# Altium PCB lab2_lyaptsev_buck.PcbDoc
Units mm, origin at the board's own origin, x right, y up, seen from the top; angles counter-clockwise.
Board outline 51.7 x 19.8 mm, 2 copper layers (Top Layer, Bottom Layer), stack 1.57 mm thick; 26 components, 17 nets, 82 pads, 49 vias.
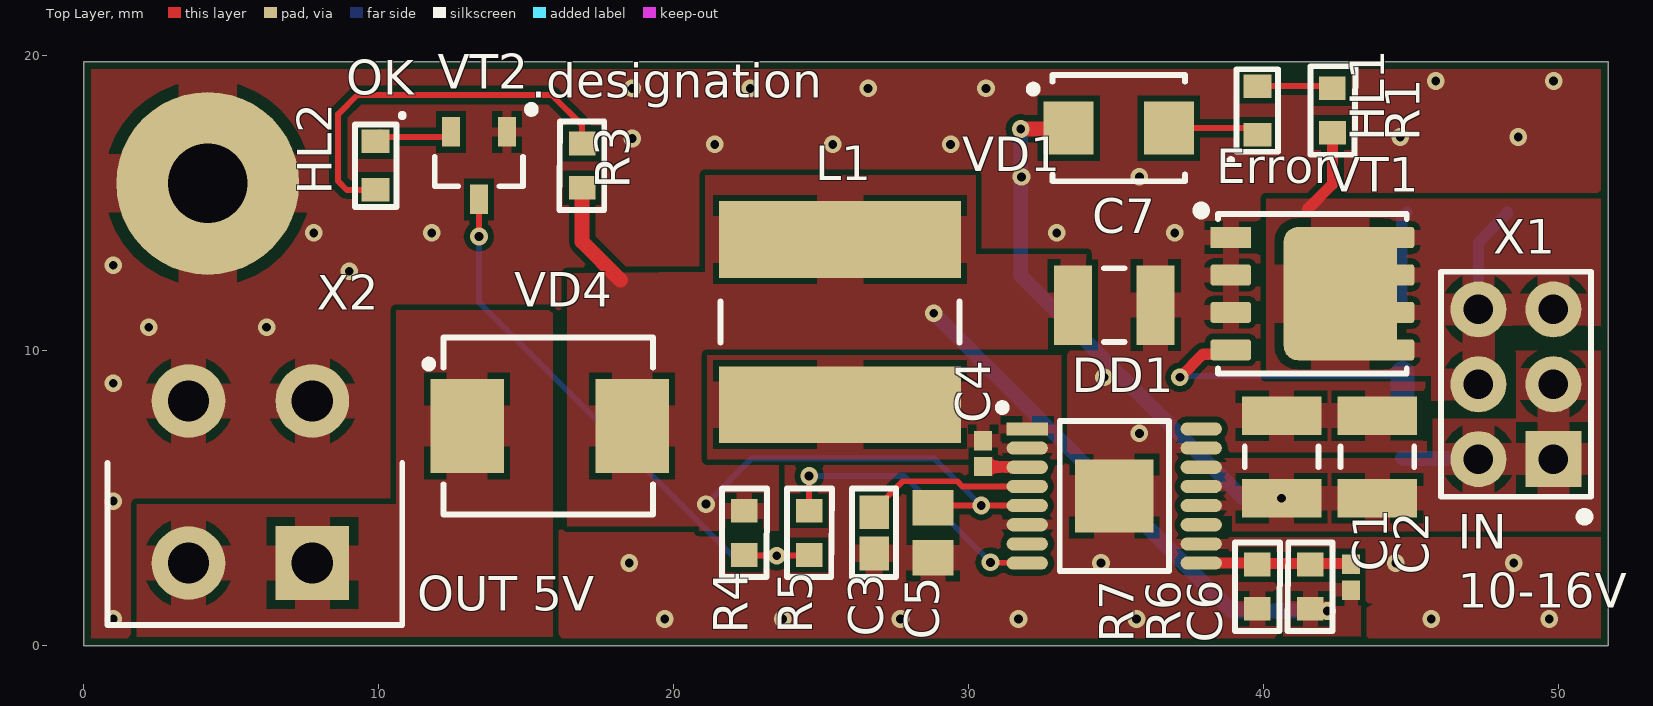
[diagram p0: Top Layer view]
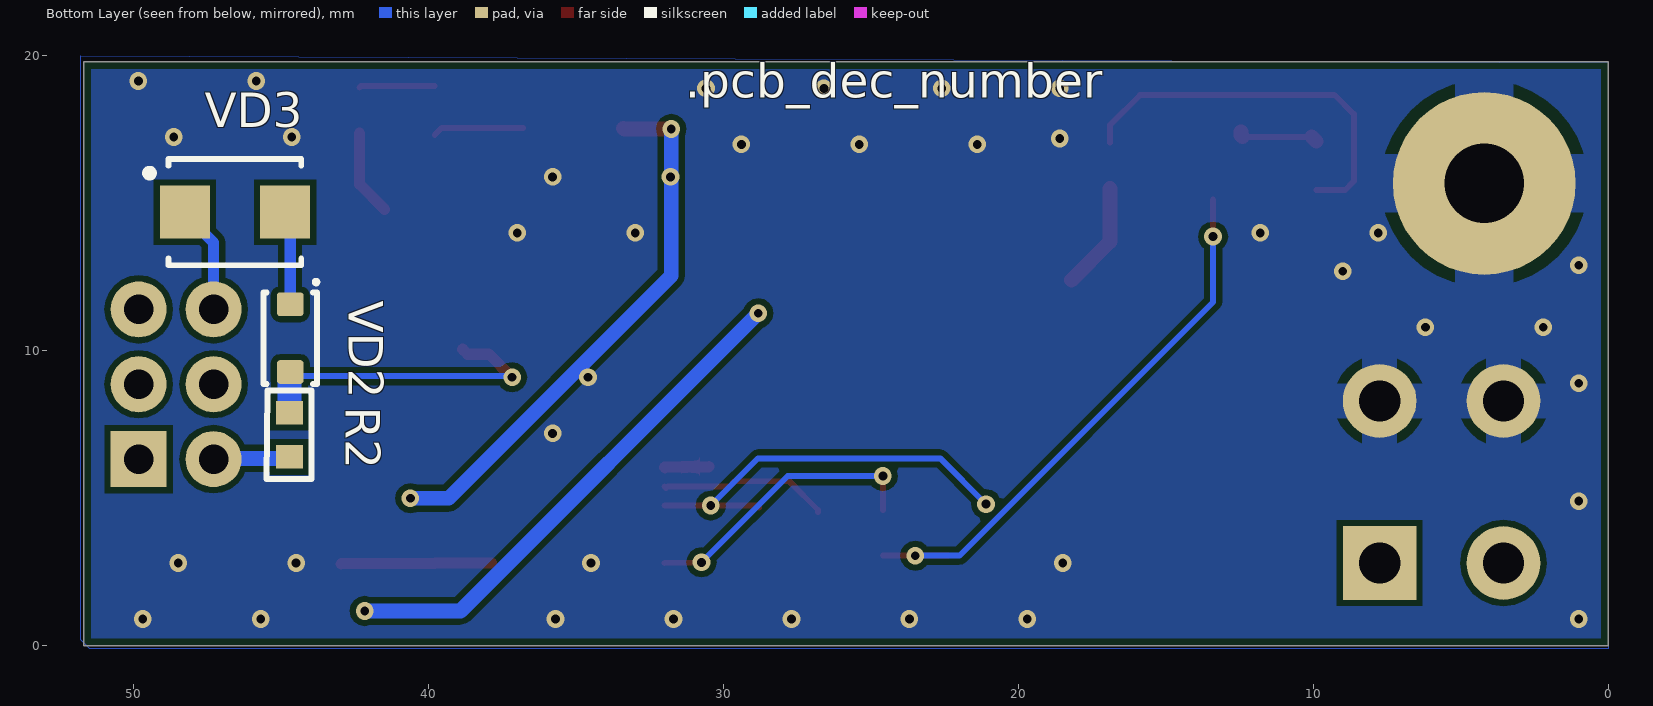
[diagram p1: Bottom Layer view, seen from below]

## Layer stack, top to bottom
Top Solder: solder mask 0.0102, Solder Resist, Dk 3.5
Top Layer: signal copper 0.035
Core 1: core 1.5, FR4, Dk 4.6
Bottom Layer: signal copper 0.035
Bottom Solder: solder mask 0.0102, Solder Resist, Dk 3.5

## Board outline
0,0 51.7,0 51.7,19.8 0,19.8

## Design rules (kind name [scope] priority, off if disabled: settings)
AcuteAngle min_acute_angle [OnCopper] p1: minimum=3.50000000000000E+0001 checktracksonly=FALSE // Минимальный угол между примитивами топологии
BoardOutlineClearance board_outline_clearance_std [NOT (OnLayer('Bottom Overlay') OR OnLayer('Top Overlay'))] p1: gap=0.25 ignorepadtopadclearanceinfootprint=FALSE except(0: Arc-SplitContinuation Track-SplitContinuation SMDPad-SplitContinuation THPad-SplitContinuation Via-SplitContinuation Fill-SplitContinuation Poly-SplitContinuation Region-SplitContinuation Text-SplitContinuation) // Отступ элементов топологии от края фрезеруемой печатной платы
Clearance clearance_outer_35um_std [OnTopLayer OR OnBottomLayer] p1: gap=0.2 ignorepadtopadclearanceinfootprint=TRUE except(0.25: Arc-Hole Track-Hole SMDPad-Hole THPad-Hole Via-Hole Fill-Hole Poly-Hole Region-Hole Text-Hole) // Зазоры на внешних слоях
Clearance clearance_inner_35um_std [NOT (OnTopLayer Or OnBottomLayer)] p2: gap=0.2 ignorepadtopadclearanceinfootprint=FALSE except(0.25: Arc-Hole Track-Hole SMDPad-Hole THPad-Hole Via-Hole Fill-Hole Poly-Hole Region-Hole Text-Hole) // Зазоры на внутренних слоях
ComponentClearance [All] p1: gap=0 collisioncheckmode=3 verticalgap=0 showdistances=FALSE
DiffPairsRouting diff_pairs_routing [All] p1: maxlimit=0.127 minlimit=0.127 mostfreqgap=0.127 toplayer_minwidth=0.143 toplayer_maxwidth=0.143 toplayer_prefwidth=0.143 bottomlayer_minwidth=0.143 bottomlayer_maxwidth=0.143 bottomlayer_prefwidth=0.143 impedanceprofiledriven=TRUE impedanceprofileid={FD46899E-B5A2-4EF5-A302-5D2DB6A51F35} maxuncoupledlength=12.7 // Правила трассировки дифференциальных пар
HoleSize min_hole_size_std [IsPad] p1: absolutevalues=TRUE maxlimit=5.9 minlimit=0.6 maxpercent=80.000 minpercent=20.000 // Диаметр межслойного переходного отверстия
HoleSize min_hole_size_via_std [IsVia] p2: absolutevalues=TRUE maxlimit=5.9 minlimit=0.3 maxpercent=80.000 minpercent=20.000 // Минимальный диаметр монтажного отверстия
HoleToHoleClearance hole_to_hole_clearance_std [All] p1: gap=0.2 allowstackedmicrovias=FALSE // Минимальное расстояние между краями двух отверстий
MinimumAnnularRing min_via_ar_std [All] p1: minimumring=0.15 // Поясок площадки переходного отверстия (Annular ring VIA)
MinimumAnnularRing min_pad_ar_std [All] p2: minimumring=0.2 // Поясок монтажной контактной площадки (Annular ring PAD)
MinimumSolderMaskSliver min_solder_mask_bridge_std [All] p1: minsoldermaskwidth=0.15 // Мнимальная ширина масочного мостика
PlaneClearance plane_clearance_35um_std [All] p1: clearance=0.2 // Отступ полигона (для слоя plane) от элементов топологии
PlaneConnect [All] p1: planeconnectstyle=Relief reliefexpansion=0.5 reliefentries=4 reliefconductorwidth=0.2 reliefairgap=0.2
PolygonConnect poly_connect_to_pad<=0.3 [(AsMM(PadXSize_AllLayers)<=0.301) or (AsMM(PadYSize_AllLayers)<=0.301)] p1: thpad.connectstyle=Relief thpad.reliefconductorwidth=0.2 thpad.reliefentries=4 thpad.polygonreliefangle="90 Angle" thpad.airgapwidth=0.2 smdpad.connectstyle=Relief smdpad.reliefconductorwidth=0.2 smdpad.reliefentries=4 smdpad.polygonreliefangle="90 Angle" smdpad.airgapwidth=0.2 via.connectstyle=Direct via.reliefconductorwidth=0.254 via.reliefentries=4 via.polygonreliefangle="90 Angle" via.airgapwidth=0.254 // Правила подключения полигонов для падов от 0,3мм и меньше
PolygonConnect poly_connect_to_pad<=0.4 [(AsMM(PadXSize_AllLayers)<=0.401) or (AsMM(PadYSize_AllLayers)<=0.401)] p2: thpad.connectstyle=Relief thpad.reliefconductorwidth=0.26 thpad.reliefentries=4 thpad.polygonreliefangle="90 Angle" thpad.airgapwidth=0.2 smdpad.connectstyle=Relief smdpad.reliefconductorwidth=0.26 smdpad.reliefentries=4 smdpad.polygonreliefangle="90 Angle" smdpad.airgapwidth=0.2 via.connectstyle=Direct via.reliefconductorwidth=0.254 via.reliefentries=4 via.polygonreliefangle="90 Angle" via.airgapwidth=0.254 // Правила подключения полигонов для падов от 0,4 и меньше
PolygonConnect poly_connect_to_pad<=0.6 [(AsMM(PadXSize_AllLayers)<=0.601) or (AsMM(PadYSize_AllLayers)<=0.601)] p3: thpad.connectstyle=Relief thpad.reliefconductorwidth=0.33 thpad.reliefentries=4 thpad.polygonreliefangle="90 Angle" thpad.airgapwidth=0.2 smdpad.connectstyle=Relief smdpad.reliefconductorwidth=0.33 smdpad.reliefentries=4 smdpad.polygonreliefangle="90 Angle" smdpad.airgapwidth=0.2 via.connectstyle=Direct via.reliefconductorwidth=0.254 via.reliefentries=4 via.polygonreliefangle="90 Angle" via.airgapwidth=0.254 // Правила подключения полигонов для падов от 0,6мм и меньше
PolygonConnect poly_connect_to_pad<=0.7 [(AsMM(PadXSize_AllLayers)<=0.701) or (AsMM(PadYSize_AllLayers)<=0.701)] p4: thpad.connectstyle=Relief thpad.reliefconductorwidth=0.46 thpad.reliefentries=4 thpad.polygonreliefangle="90 Angle" thpad.airgapwidth=0.2 smdpad.connectstyle=Relief smdpad.reliefconductorwidth=0.46 smdpad.reliefentries=4 smdpad.polygonreliefangle="90 Angle" smdpad.airgapwidth=0.2 via.connectstyle=Direct via.reliefconductorwidth=0.254 via.reliefentries=4 via.polygonreliefangle="90 Angle" via.airgapwidth=0.254 // Правила подключения полигонов для падов от 0,7мм и меньше
PolygonConnect poly_connect_to_pad<=0.8 [(AsMM(PadXSize_AllLayers)<=0.8)or(AsMM(PadYSize_AllLayers)<=0.8)] p5: thpad.connectstyle=Relief thpad.reliefconductorwidth=0.53 thpad.reliefentries=4 thpad.polygonreliefangle="90 Angle" thpad.airgapwidth=0.3 smdpad.connectstyle=Relief smdpad.reliefconductorwidth=0.53 smdpad.reliefentries=4 smdpad.polygonreliefangle="90 Angle" smdpad.airgapwidth=0.2 via.connectstyle=Direct via.reliefconductorwidth=0.254 via.reliefentries=4 via.polygonreliefangle="90 Angle" via.airgapwidth=0.254 // Правила подключения полигонов для падов от 0,8мм и меньше
PolygonConnect poly_connect_to_pad<=1 [(AsMM(PadXSize_AllLayers)<=1.01)or(AsMM(PadYSize_AllLayers)<=1.01)] p6: thpad.connectstyle=Relief thpad.reliefconductorwidth=0.6 thpad.reliefentries=4 thpad.polygonreliefangle="90 Angle" thpad.airgapwidth=0.3 smdpad.connectstyle=Relief smdpad.reliefconductorwidth=0.6 smdpad.reliefentries=4 smdpad.polygonreliefangle="90 Angle" smdpad.airgapwidth=0.2 via.connectstyle=Direct via.reliefconductorwidth=0.254 via.reliefentries=4 via.polygonreliefangle="90 Angle" via.airgapwidth=0.254 // Правила подключения полигонов для падов от 1мм и меньше
PolygonConnect poly_connect_to_pad<=1.3 [(AsMM(PadXSize_AllLayers)<=1.31)or(AsMM(PadYSize_AllLayers)<=1.31)] p7: thpad.connectstyle=Relief thpad.reliefconductorwidth=0.66 thpad.reliefentries=4 thpad.polygonreliefangle="90 Angle" thpad.airgapwidth=0.3 smdpad.connectstyle=Relief smdpad.reliefconductorwidth=0.86 smdpad.reliefentries=4 smdpad.polygonreliefangle="90 Angle" smdpad.airgapwidth=0.2 via.connectstyle=Direct via.reliefconductorwidth=0.254 via.reliefentries=4 via.polygonreliefangle="90 Angle" via.airgapwidth=0.254 // Правила подключения полигонов для падов от 1,3мм и меньше
PolygonConnect poly_connect_to_pad<=1.6 [(AsMM(PadXSize_AllLayers)<=1.61)or(AsMM(PadYSize_AllLayers)<=1.61)] p8: thpad.connectstyle=Relief thpad.reliefconductorwidth=0.8 thpad.reliefentries=4 thpad.polygonreliefangle="90 Angle" thpad.airgapwidth=0.3 smdpad.connectstyle=Relief smdpad.reliefconductorwidth=1 smdpad.reliefentries=4 smdpad.polygonreliefangle="90 Angle" smdpad.airgapwidth=0.2 via.connectstyle=Direct via.reliefconductorwidth=0.254 via.reliefentries=4 via.polygonreliefangle="90 Angle" via.airgapwidth=0.254 // Правила подключения полигонов для падов от 1,6мм и меньше
PolygonConnect poly_connect_to_pad<=1.8 [(AsMM(PadXSize_AllLayers)<=1.8)or(AsMM(PadYSize_AllLayers)<=1.8)] p9: thpad.connectstyle=Relief thpad.reliefconductorwidth=1 thpad.reliefentries=4 thpad.polygonreliefangle="90 Angle" thpad.airgapwidth=0.3 smdpad.connectstyle=Relief smdpad.reliefconductorwidth=1.2 smdpad.reliefentries=4 smdpad.polygonreliefangle="90 Angle" smdpad.airgapwidth=0.2 via.connectstyle=Direct via.reliefconductorwidth=0.254 via.reliefentries=4 via.polygonreliefangle="90 Angle" via.airgapwidth=0.254 // Правила подключения полигонов для падов от 1,8мм и меньше
PolygonConnect poly_connect_to_pad<=2 [(AsMM(PadXSize_AllLayers)<=2.01)or(AsMM(PadYSize_AllLayers)<=2.01)] p10: thpad.connectstyle=Relief thpad.reliefconductorwidth=1.1 thpad.reliefentries=4 thpad.polygonreliefangle="90 Angle" thpad.airgapwidth=0.3 smdpad.connectstyle=Relief smdpad.reliefconductorwidth=1.4 smdpad.reliefentries=4 smdpad.polygonreliefangle="90 Angle" smdpad.airgapwidth=0.2 via.connectstyle=Direct via.reliefconductorwidth=0.254 via.reliefentries=4 via.polygonreliefangle="90 Angle" via.airgapwidth=0.254 // Правила подключения полигонов для падов от 2мм и меньше
PolygonConnect poly_connect_to_pad<=2.3 [(AsMM(PadXSize_AllLayers)<=2.31)or(AsMM(PadYSize_AllLayers)<=2.31)] p11: thpad.connectstyle=Relief thpad.reliefconductorwidth=1.2 thpad.reliefentries=4 thpad.polygonreliefangle="90 Angle" thpad.airgapwidth=0.3 smdpad.connectstyle=Relief smdpad.reliefconductorwidth=1.4 smdpad.reliefentries=4 smdpad.polygonreliefangle="90 Angle" smdpad.airgapwidth=0.2 via.connectstyle=Direct via.reliefconductorwidth=0.254 via.reliefentries=4 via.polygonreliefangle="90 Angle" via.airgapwidth=0.254 // Правила подключения полигонов для падов от 2,3мм и меньше
PolygonConnect poly_connect_to_pad<=2.5 [(AsMM(PadXSize_AllLayers)<=2.51)or(AsMM(PadYSize_AllLayers)<=2.51)] p12: thpad.connectstyle=Relief thpad.reliefconductorwidth=1.2 thpad.reliefentries=4 thpad.polygonreliefangle="90 Angle" thpad.airgapwidth=0.3 smdpad.connectstyle=Relief smdpad.reliefconductorwidth=1.4 smdpad.reliefentries=4 smdpad.polygonreliefangle="90 Angle" smdpad.airgapwidth=0.2 via.connectstyle=Direct via.reliefconductorwidth=0.254 via.reliefentries=4 via.polygonreliefangle="90 Angle" via.airgapwidth=0.254 // Правила подключения полигонов для падов от 2,5мм и меньше
PolygonConnect poly_connect_to_pad<=2.7 [(AsMM(PadXSize_AllLayers)<=2.71)or(AsMM(PadYSize_AllLayers)<=2.71)] p13: thpad.connectstyle=Relief thpad.reliefconductorwidth=1.4 thpad.reliefentries=4 thpad.polygonreliefangle="90 Angle" thpad.airgapwidth=0.3 smdpad.connectstyle=Relief smdpad.reliefconductorwidth=1.6 smdpad.reliefentries=4 smdpad.polygonreliefangle="90 Angle" smdpad.airgapwidth=0.2 via.connectstyle=Direct via.reliefconductorwidth=0.254 via.reliefentries=4 via.polygonreliefangle="90 Angle" via.airgapwidth=0.254 // Правила подключения полигонов для падов от 2,7мм и меньше
PolygonConnect poly_connect_to_pad<=3 [(AsMM(PadXSize_AllLayers)<=3.01)or(AsMM(PadYSize_AllLayers)<=3.01)] p14: thpad.connectstyle=Relief thpad.reliefconductorwidth=1.6 thpad.reliefentries=4 thpad.polygonreliefangle="90 Angle" thpad.airgapwidth=0.3 smdpad.connectstyle=Relief smdpad.reliefconductorwidth=1.8 smdpad.reliefentries=4 smdpad.polygonreliefangle="90 Angle" smdpad.airgapwidth=0.2 via.connectstyle=Direct via.reliefconductorwidth=0.254 via.reliefentries=4 via.polygonreliefangle="90 Angle" via.airgapwidth=0.254 // Правила подключения полигонов для падов от 3мм и меньше
PolygonConnect poly_connect_to_pad<=7 [(AsMM(PadXSize_AllLayers)<7.01)or(AsMM(PadYSize_AllLayers)<=7.01)] p15: thpad.connectstyle=Relief thpad.reliefconductorwidth=2 thpad.reliefentries=4 thpad.polygonreliefangle="90 Angle" thpad.airgapwidth=0.4 smdpad.connectstyle=Relief smdpad.reliefconductorwidth=2 smdpad.reliefentries=4 smdpad.polygonreliefangle="90 Angle" smdpad.airgapwidth=0.3 via.connectstyle=Direct via.reliefconductorwidth=0.254 via.reliefentries=4 via.polygonreliefangle="90 Angle" via.airgapwidth=0.254 // Правила подключения полигонов для падов от 7мм и меньше
PolygonConnect poly_connect_to_pad [All] p16: thpad.connectstyle=Relief thpad.reliefconductorwidth=0.25 thpad.reliefentries=4 thpad.polygonreliefangle="90 Angle" thpad.airgapwidth=0.2 smdpad.connectstyle=Relief smdpad.reliefconductorwidth=0.25 smdpad.reliefentries=4 smdpad.polygonreliefangle="90 Angle" smdpad.airgapwidth=0.2 via.connectstyle=Direct via.reliefconductorwidth=0.25 via.reliefentries=4 via.polygonreliefangle="90 Angle" via.airgapwidth=0.2 // Правила подключения полигонов общие
RoutingCorners [All] p1 off: cornerstyle=45-Degree minsetback=2.5 maxsetback=2.5
RoutingVias [All] p1: holewidth=0.3 width=0.6 viastyle="Through Hole" minholewidth=0.3 minwidth=0.6 maxholewidth=5.9 maxwidth=6.4
SilkToSilkClearance silk_to_silk_clearance_std [All] p1 off: silktosilkclearance=0.15 // Отступ текста шелкографии от других примитивов шелкографии
SilkToSolderMaskClearance silk_to_solder_mask_clearance_std [IsPad] p1 off: minsilkscreentomaskgap=0.15 clearancetoexposedcopper=FALSE // Минимальное расстояние между элементами шелкографии и вскрытой медью
SolderMaskExpansion solder_mask_expansion_std [All] p1: expansion=0.05 // Припуск паяльной масски
UnRoutedNet [All] p1: checkbadconnections=TRUE
Width width_35um_std [All] p1: maxlimit=10 minlimit=0.2 preferedwidth=0.2 checkconnectedcopper=TRUE // Ширина проводников (общая)
19 further rules are at their usual default settings.

## Components (designator, comment, footprint, x,y, rotation, side; value= is the part's Value field where it differs from the comment)
C1 "10мк" C1210 40.625,6.4 r90 top
C2 "22мк" C1210 43.875,6.4 r90 top
C3 "10 мк" C0603 26.8,3.825 r270 top
C4 "470н" C0402 30.5,6.515 r90 top
C5 "4,7 мк" C0805 28.8,3.825 r270 top
C6 "20п" C0402 42.975,2.325 r90 top
C7 "22мк" C1210 34.95,11.55 r0 top
DD1 "LM46002PWP" HTSSOP-16 34.95,5.075 r0 top
HL1 "TLMS1000-GS08" HL0603 39.8,18.15 r90 top
HL2 "TLMG1100-GS08" HL0603 9.9,16.28 r270 top
L1 "SRN8040-100M" SRN-2-815X790X400 25.65,10.975 r90 top
R1 "2 к" R0603 42.35,18.15 r90 top
R2 "100" R0603 44.725,7.15 r270 bottom
R3 "2 к" R0603 16.9,16.28 r270 top
R4 "44,2 к" R0603 22.4,3.825 r90 top
R5 "100" R0603 24.6,3.825 r90 top
R6 "1 М" R0603 41.6,2 r270 top
R7 "255 к" R0603 39.8,2 r90 top
VD1 "SL13-E3/5AT" DO-214AC 35.1,17.55 r0 top
VD2 "PLZ15C" DO-219AC 44.725,10.43 r90 bottom
VD3 "SL13-E3/5AT" DO-214AC 46.575,14.7 r180 bottom
VD4 "SS36-E3/57T" DO-214AB 15.8,7.45 r0 top
VT1 "CSD19532Q5B" SON-8 41.67,11.935 r270 top
VT2 "IRLML2502TRPBF" SOT-23-3 13.4,16.28 r270 top
X1 "DS1021-2*3SF11" DS1021-2X3SF11 48.57,8.865 r90 top
X2 "4-1775099-0" 4-1775099-0 5.8,6.2 r180 top

## Footprints (in the part's own frame and the unit in brackets; to place one, negate y for a bottom-side part, rotate by r counter-clockwise, add the part's x,y. Pads: shape width x height; smd on the part's side, far side on the other; paste and mask are expansions set on the pad)
4-1775099-0 [mm]
  rect 2.5x2.5 hole 1.4: 1(-1.95,3.4)
  round 2.5 hole 1.4: 2(2.25,3.4) 3(-1.95,-2.1) 4(2.25,-2.1)
  silkscreen extent -5,0 5,5.5, body extent -4.95,-5.45 4.9,5.45, height 12.8
C0402 [mm] "Chip Capacitor, 2-Leads, Body 1,00x0,50mm, IPC Medium Density"
  rect 0.66x0.62 smd: 1(-0.44,0) 2(0.44,0)
  body extent -0.5,-0.25 0.5,0.25, height 0.5
C0603 [mm] "Chip Capacitor, 2-Leads, Body 1,60x0,80mm, IPC Medium Density"
  rect 1.15x1 smd: 1(-0.7,0) 2(0.7,0)
  silkscreen extent -1.5,-0.75 1.5,0.75, body extent -0.8,-0.4 0.8,0.4, height 0.8
C0805 [mm] "Chip Diode, 2-Leads, Body 2,00x1,25mm, IPC Medium Density"
  rect 1.2x1.4 smd: 1(-0.85,0) 2(0.85,0)
  body extent -1.05,-0.67 1.05,0.67, height 0.85
C1210 [mm] "Chip Diode, 2-Leads, Body 3,20x2,50mm, IPC Medium Density"
  rect 1.3x2.7 smd: 1(-1.4,0) 2(1.4,0)
  silkscreen extent -0.35,-1.25 0.35,1.25, body extent -1.7,-1.35 1.7,1.35, height 0.85
DO-214AB [mm] "Molded Diode, 2-Leads, Body 7,94x5,91mm, IPC Medium Density"
  rect 2.5x3.2 smd: 1(-2.8,0) 2(2.8,0)
  silkscreen extent -4.22,-3 3.5,3, body extent -3.95,-2.95 3.95,2.95, height 2.59
DO-214AC [mm] "Molded Diode, 2-Leads, Body 4,25x2,67mm, IPC Medium Density"
  rect 1.7x1.8 smd: 1(-1.7,0) 2(1.7,0)
  silkscreen extent -3.02,-1.8 2.25,1.8, body extent -2.7,-1.81 2.7,1.81, height 2.43
DO-219AC [mm]
  rrect25% 0.8x0.9 smd: 1(-1.15,-0.025) 2(1.15,-0.025)
  silkscreen extent -1.55,-0.97 1.97,0.88, body extent -1.22,-0.67 1.28,0.63, height 0.71
DS1021-2X3SF11 [mm]
  rect 1.9x1.9 hole 1: 1(-2.54,-1.27)
  round 1.9 hole 1: 2(-2.54,1.27) 3(0,-1.27)
  round 1.9 hole 1 mask+0.102: 4(0,1.27) 5(2.54,-1.27) 6(2.54,1.27)
  silkscreen extent -4.5,-2.55 3.81,2.54, body extent -3.81,-2.54 3.81,2.54, height 8.59
HL0603 [mm] "Chip Diode, 2-Leads, Body 1,60x0,80mm, IPC Medium Density"
  rect 0.8x0.95 smd: 1(-0.825,0) 2(0.825,0)
  silkscreen extent -1.75,-0.7 1.4,0.95, body extent -0.81,-0.4 0.81,0.4, height 0.6
HTSSOP-16 [mm] "TSOP, 16-Leads, Body 5,00x4,40mm, Pitch 0,65mm, Thermal Pad 2,46x2,66mm, IPC Medium Density"
  rect 2.66x2.46 smd: 0(0,0)
  rect 1.4x0.45 smd: 1(-2.95,2.275)
  oval 1.4x0.45 smd: 2(-2.95,1.625) 3(-2.95,0.975) 4(-2.95,0.325) 5(-2.95,-0.325) 6(-2.95,-0.975) 7(-2.95,-1.625) 8(-2.95,-2.275) 9(2.95,-2.275) 10(2.95,-1.625) 11(2.95,-0.975) 12(2.95,-0.325) 13(2.95,0.325) 14(2.95,0.975) 15(2.95,1.625) 16(2.95,2.275)
  silkscreen extent -3.92,-2.55 1.85,3.12, body extent -3.2,-2.5 3.2,2.5, height 1.2
R0603 [mm] "Chip Resistor, 2-Leads, Body 1,60x0,80mm, IPC Medium Density"
  rect 0.8x0.9 smd: 1(-0.75,0) 2(0.75,0)
  silkscreen extent -1.5,-0.77 1.5,0.75, body extent -0.77,-0.43 0.78,0.43, height 0.43
SON-8 [mm]
  rrect25% 0.71x1.372 smd paste-10: D(-1.905,2.77) D(-0.635,2.77) D(0.635,2.77) D(1.905,2.77)
  rrect25% 4.52x3.85 smd paste-10: D(0,0.95)
  rrect25% 0.71x1.372 smd paste-0.002: G(1.905,-2.77) S(-0.635,-2.77) S(0.635,-2.77)
  rect 0.71x1.372 smd paste-0.002: S(-1.905,-2.77)
  silkscreen extent -2.83,-3.78 2.7,3.2, body extent -2.48,-3.05 2.52,2.95, height 1.05
SOT-23-3 [mm] "SOT-23, 3-Leads, Body 2,92x2,37mm"
  rect 1x0.6 smd: D(-1.145,-0.95) G(1.145,0) S(-1.145,0.95)
  silkscreen extent -2.03,-1.5 0.7,1.9, body extent -1.25,-1.5 1.25,1.5, height 1.1
SRN-2-815X790X400 [mm]
  rect 2.6x8.2 smd: 1(-2.8,0) 2(2.8,0)
  silkscreen extent -0.7,-4.05 0.7,4.05, body extent -4.01,-4 4.01,4, height 4

## Part data
C1: library part с0036, "=Описание", HelpURL=https://search.murata.co.jp/Ceramy/image/img/A01X/G101/ENG/GRM32ER71H106KA12-04A.pdf, ID=с0036, Корпус=1210, Наименование=GRM32ER71H106KA12L, Напряжение="50 В", Номинал=10мк, Номинальное напряжение="50 В", Описание="Конденсатор чип 1210 10 мкФ 50 В ±15 %", Отклонение="±15 %", Производитель=MuRata, Рабочие температуры="от -55 °С до +125 °С", Фамилия=Ляпцев
C2: library part с0035, "=Описание", HelpURL=https://www.yageo.com/upload/media/product/productsearch/datasheet/mlcc/UPY-GPHC_X7R_6.3V-to-50V_20.pdf, ID=с0035, Корпус=1210, Наименование=CC1210KKX7R8BB226, Напряжение="25 В", Номинал=22мк, Номинальное напряжение="25 В", Описание="Конденсатор чип 1210 22 мкФ 25 В ±15 %", Отклонение="±15 %", Производитель="YAGEO Corp.", Рабочие температуры="от -55 °С до +125 °С", Фамилия=Ляпцев
C3: library part с0040, "=Описание", HelpURL=https://www.yageo.com/upload/media/product/productsearch/datasheet/mlcc/UPY-GPHC_X5R_4V-to-50V_26.pdf, ID=с0040, Корпус=0603, Наименование=CC0603MRX5R5BB106, Напряжение="6,3 В", Номинал="10 мк", Номинальное напряжение="6,3 В", Описание="Конденсатор чип 0603 10 мкФ 6,3 В ±20 %", Отклонение="±20 %", Производитель="YAGEO Corp.", Рабочие температуры="от -55 °С до +85 °С", Фамилия=Ляпцев
C4: library part с0039, "=Описание", HelpURL=https://www.murata.com/en-sg/products/productdetail?partno=GRM155R60J474KE19%23, ID=с0039, Корпус=0402, Наименование=GRM155R60J474KE19D, Напряжение="6,3 В", Номинал=470н, Номинальное напряжение="6,3 В", Описание="Конденсатор чип 0402 470 нФ 6,3 В ±15 %", Отклонение="±15 %", Производитель=MuRata, Рабочие температуры="от -55 °С до +85 °С", Фамилия=Ляпцев
C5: library part с0041, "=Описание", HelpURL=https://www.murata.com/en-global/products/productdetail?partno=GRM219R61A475KE34%23, ID=с0041, Корпус=805, Наименование=GRM219R61A475KE34, Напряжение="10 В", Номинал="4,7 мк", Номинальное напряжение="10 В", Описание="Конденсатор чип 0805 4,7 мкФ 10 В ±15 %", Отклонение="±15 %", Производитель=MuRata, Рабочие температуры="от -55 °С до +85 °С", Фамилия=Ляпцев
C6: library part с0038, "=Описание", HelpURL=https://www.yageo.com/upload/media/product/productsearch/datasheet/mlcc/UPY-GP_NP0_16V-to-50V_18.pdf, ID=с0038, Корпус=0402, Наименование=CC0402JRNPO9BN200, Напряжение="50 В", Номинал=20п, Номинальное напряжение="50 В", Описание="Конденсатор чип 0402 20 пФ 25 В ±5 %", Отклонение="±5 %", Производитель="YAGEO Corp.", Рабочие температуры="от -55 °С до +85 °С", Фамилия=Ляпцев
C7: library part с0037, "=Описание", HelpURL=https://search.murata.co.jp/Ceramy/image/img/A01X/G101/ENG/GRM32ER61E226KE15-01.pdf, ID=с0037, Корпус=1210, Наименование=GRM32ER61E226KE15L, Напряжение="25 В", Номинал=22мк, Номинальное напряжение="25 В", Описание="Конденсатор чип 1210 22 мкФ 25 В ±15 %", Отклонение="±15 %", Производитель=MuRata, Рабочие температуры="от -55 °С до +125 °С", Фамилия=Ляпцев
DD1: library part dd0006, "=Описание", HelpURL=https://www.ti.com/product/LM46002, ID=dd0006, Входное напряжение="от 3,5 В до 60 В", Выходное напряжение="от 1 В до 28 В", Коммутируемый ток="от 0 А до 2 А", Корпус=HTSSOP-16, Наименование=LM46002PWP, Описание="Понижающий преобразователь напряжения 60 В и 2 А", Производитель="Texas Instruments", Рабочие температуры="от -40 °С до +125 °С", Фамилия=Ляпцев, Частота переключения="от 200 кГц до 2,2 МГц"
HL1: library part hl0001, "=Описание", HelpURL=https://www.vishay.com/leds/list/product-83172/, ID=hl0001, Корпус=0603, Наименование=TLMS1000-GS08, Номинальная длина волны="628 нм", Номинальная сила света="4 мкд", Номинальное падение напряжения="1,8 В", Номинальный прямой ток="15 мА", Описание="Светодиод чип 0603 красный", Производитель="Vishay Intertechnology, Inc.", Рабочие температуры="от -40 °С до +100 °С", Рассеиваемая мощность="40 мВт", Фамилия=Ларионов, Цвет=Red
HL2: library part hl0005, "=Описание", HelpURL=https://www.vishay.com/leds/list/product-83173/, ID=hl0005, Корпус=0603, Наименование=TLMG1100-GS08, Номинальная длина волны="570 нм", Номинальная сила света="35 мкд", Номинальное падение напряжения="2,1 В", Номинальный прямой ток="30 мА", Описание="Светодиод чип 0603 зеленый", Производитель="Vishay Intertechnology, Inc.", Рабочие температуры="от -40 °С до +100 °С", Рассеиваемая мощность="90 мВт", Фамилия=Ларионов, Цвет=Green
L1: library part l0004, "=Описание", HelpURL=https://www.bourns.com/products/magnetic-products/power-inductors-smd-semi-shielded/product/SRN8040, ID=l0004, Индуктивность="10 мкГн", Корпус="8,15 х 7,9 х 4,0", Максимальное активное сопротивление="50 мОм", Наименование=SRN8040-100M, Номинал="10 мкГн", Номинальное активное сопротивление="50 мОм", Номинальный ток (при нагреве на 20 °С/40 °С)="3,1 А", Описание="Катушка индуктивности 10 мкГн ±20 %", Отклонение="±20 %", Производитель="Bourns, Inc.", Рабочее напряжение="не указано", Рабочие температуры="от –40 °С до +125 °С", Резонансная частота="2,52 МГц", Ток насыщения="3,4 А", Фамилия=Ляпцев
R1 R3: library part r0014, "=Описание", HelpURL=https://www.yageo.com/upload/media/product/productsearch/datasheet/rchip/PYu-RC_Group_51_RoHS_L_11.pdf, ID=r0014, Корпус=0603, Наименование=RC0603FR-072KL, Номинал="2 к", Номинальное напряжение="75 В", Номинальный ток="1 А", Описание="Резистор чип 0603 2 кОм ±1 % 0,1 Вт", Отклонение="±1 %", Производитель="YAGEO Corp.", Рабочие температуры="от -55 °С до +155 °С", Фамилия=Ларионов
R2 R5: library part r0007, "=Описание", HelpURL=https://www.yageo.com/upload/media/product/productsearch/datasheet/rchip/PYu-RC_Group_51_RoHS_L_11.pdf, ID=r0007, Корпус=0603, Наименование=RC0603FR??07100RL, Номинал=100, Номинальное напряжение="75 В", Номинальный ток="1 А", Описание="Резистор чип 0603 100 Ом ±1 % 0,1 Вт", Отклонение="±1 %", Производитель="YAGEO Corp.", Рабочие температуры="от -55 °С до +155 °С", Фамилия=Самарин
R4: library part r0026, "=Описание", HelpURL=https://www.yageo.com/upload/media/product/productsearch/datasheet/rchip/PYu-RC_Group_51_RoHS_L_11.pdf, ID=r0026, Корпус=0603, Наименование=RC0603FR-0744K2L, Номинал="44,2 к", Номинальное напряжение="75 В", Номинальный ток="1 А", Описание="Резистор чип 0603 44,2 кОм ±1 % 0,1 Вт", Отклонение="±1 %", Производитель="YAGEO Corp.", Рабочие температуры="от -55 °С до +155 °С", Фамилия=Ларионов
R6: library part r0038, "=Описание", HelpURL=https://www.yageo.com/upload/media/product/productsearch/datasheet/rchip/PYu-RC_Group_51_RoHS_L_11.pdf, ID=r0038, Корпус=0603, Наименование=RC0603FR-071ML, Номинал="1 М", Номинальное напряжение="75 В", Номинальный ток="1 А", Описание="Резистор чип 0603 1 МОм ±1 % 75 В", Отклонение="±1 %", Производитель="YAGEO Corp.", Рабочие температуры="от -55 °С до +155 °С", Фамилия=Ляпцев
R7: library part r0039, "=Описание", HelpURL=https://www.yageo.com/upload/media/product/productsearch/datasheet/rchip/PYu-RC_Group_51_RoHS_L_11.pdf, ID=r0039, Корпус=0603, Наименование=RC0603FR-07255KL, Номинал="255 к", Номинальное напряжение="75 В", Номинальный ток="1 А", Описание="Резистор чип 0603 255 кОм ±1 % 75 В", Отклонение="±1 %", Производитель="YAGEO Corp.", Рабочие температуры="от -55 °С до +155 °С", Фамилия=Ляпцев
VD1 VD3: library part vd0001, "=Описание", HelpURL=https://www.vishay.com/product?docid=88740, ID=vd0001, Импульсное обратное напряжение="30 В", Корпус=DO-214AC, Макс допустимый средний прямой ток="1,5 А", Наименование=SL13-E3/5AT, Описание="Диод Шоттки 30 В 1,5 А", Пиковое прямое напряжение="0,445 В", Производитель="Vishay Intertechnology, Inc.", Рабочие температуры="от -55 °С до +125 °С", Фамилия=Ларионов
VD2: library part vd0003, "=Описание", ID=vd0003, Корпус=DO-219AC, Корпус1=DO-219AC, Наименование=PLZ15C, Описание="Стабилитрон 15В", Пиковое прямое напряжение=15В, Производитель="Vishay Intertechnology, Inc.", Рабочие температуры="от -40 до + 150", Фамилия=Ляпцев
VD4: library part vd0004, "=Описание", HelpURL=https://www.vishay.com/product?docid=88751, ID=vd0004, Импульсное обратное напряжение="60 В", Корпус=DO-214AB, Макс допустимый средний прямой ток="3 А", Наименование=SS36-E3/57T, Описание="Диод Шоттки 60 В 3 А", Пиковое прямое напряжение="0,75 В", Производитель="Vishay Intertechnology, Inc.", Рабочие температуры="от –55 °С до +150 °С", Фамилия=Жернаков
VT1: library part vt0001, "=Описание", HelpURL=https://www.ti.com/product/CSD19532Q5B?keyMatch=CSD19532Q5B&tisearch=Search-EN-everything&usecase=OPN, ID=vt0001, Корпус=SON-8, Наименование=CSD19532Q5B, Напряжение затвор-исток="±20 В", Напряжение сток-исток="100 В", Описание="Транзистор полевой N-канальный 100 В 17 А", Производитель="Texas Instruments", Рабочие температуры="от -55 °С до +150 °С", Сопротивление сток-исток="0,0057 Ом", Ток стока="17 А", Фамилия=Жернаков
VT2: library part vt0002, "=Описание", HelpURL=https://www.infineon.com/cms/en/product/power/mosfet/12v-300v-n-channel-power-mosfet/irlml2502/, ID=vt0002, Корпус=SOT-23-3, Наименование=IRLML2502TRPBF, Напряжение затвор — исток="±12 В", Напряжение сток — исток="20 В", Описание="Транзистор полевой N-канальный 20 В 4,2 А", Производитель="Infineon Technologies AG", Рабочие температуры="от –55 °С до +150 °С", Сопротивление сток — исток="0,080 Ом", Ток стока="4,2 А", Фамилия=Паньков
X1: library part x0005, "=Описание", Contact_1=VIN, Contact_2=VIN, Contact_3=VIN, Contact_4=0V, Contact_5=0V, Contact_6=0V, HelpURL=http://www.connfly.com/productshow.aspx?id=118, ID=x0005, Наименование=DS1021-2*3SF11, Описание="PLS 3x2 pin 2,54 мм вилка прямой", Производитель="Connfly Electronic Co. LTD.", Фамилия=Самарин
X2: library part x0004, "=Описание", Contact_1=VOUT, Contact_2=VOUT, Contact_3=GND, Contact_4=GND, HelpURL=https://www.te.com/usa-en/product-4-1775099-0.html, ID=x0004, Наименование=4-1775099-0, Описание="ATX Power 4 pin гнездо прямой", Производитель="TE Connectivity", Фамилия=Ларионов

## Free pads (board coordinates)
  round 6.2 hole 2.7: 2(4.2,15.676)

## Via types
v1: diameter 0.6, hole 0.3, Top Layer to Bottom Layer, tented both sides, 49 vias

## Nets (pads, with @x,y where several pads share a name; then routed paths per layer and width w, separated by ;. In a path a pad name is that pad's centre, name@x,y a point inside that pad or via, vN(x,y) a via of type N, cw(c..) or ccw(c..) an arc to the next point about the centre after c; other vN are vias at no path point)
0V_IN: R1.1 VD3.1 VT1.D X1.4 X1.5 X1.6 | length 6.6
  Top Layer w0.381: 41.5,14.8 42.35,15.65 R1.1@42.35,17.375
  Bottom Layer w0.381: X1.6 47.3,13.675 48.275,14.65 VD3.1
+VIN: C1.1 C2.1 DD1.12 DD1.13 DD1.14 R2.2 VD1.1 X1.1 X1.2 X1.3 | length 21.2
  Top Layer w0.5: v1(31.775,17.525) 33.375,17.525 VD1.1
  Bottom Layer w0.5: v1(31.775,17.525) 31.775,12.55 39.325,5 v1(40.625,5) ; R2.2@44.725,6.375 44.75,6.35 47.275,6.35 X1.2
+VOUT: C5.1 C6.1 C7.1 DD1.5 L1.2 R3.2 R4.2 R6.2 VD4.2 | length 35.1
  Top Layer w0.2: C5.1 28.875,4.75 v1(30.438,4.75) DD1.5
  Top Layer w0.5: R3.2@16.9,15.505 16.9,13.7 18.2,12.4
  Bottom Layer w0.2: v1(21.1,4.8) 22.65,6.35 28.838,6.35 v1(30.438,4.75)
  Bottom Layer w0.5: v1(28.825,11.275) 38.925,1.175 v1(42.175,1.175)
BOOT: C4.1 DD1.3 | length 1.5
  Top Layer w0.381: C4.1 30.512,6.062 31.961,6.062 31.987,6.037 DD1.3
FB: C6.2 DD1.9 R6.1 R7.2 | length 5.1
  Top Layer w0.381: DD1.9@37.875,2.8 39.775,2.8 39.792,2.782 42.958,2.782 C6.2
GND: C1.2 C2.2 C3.2 C5.2 C7.2 DD1.0 DD1.6 DD1.10 DD1.15 pad.2 R7.1 VT1.S VT2.S X2.3 X2.4
  other v1: 1,0.9 19.7,0.9 23.7,0.9 27.7,0.9 31.7,0.9 35.7,0.9 45.7,0.9 49.7,0.9 18.5,2.8 34.5,2.8 44.5,2.8 48.5,2.8 1,4.9 35.8,7.2 1,8.9 34.6,9.1 2.2,10.8 6.2,10.8 9,12.7 1,12.9 7.8,14 11.8,14 33,14 37,14 31.8,15.9 35.8,15.9 21.4,17 25.4,17 29.4,17 18.6,17.2 44.65,17.25 48.65,17.25 18.6,18.9 22.6,18.9 26.6,18.9 30.6,18.9 45.85,19.15 49.85,19.15
NetHL1_1: HL1.1 VD1.2 | length 3.1
  Top Layer w0.2: VD1.2 39.575,17.55 HL1.1
NetHL1_2: HL1.2 R1.2 | length 2.6
  Top Layer w0.2: HL1.2 42.3,18.975 R1.2@42.35,18.925
NetHL2_1: HL2.1 VT2.D | length 2.8
  Top Layer w0.2: HL2.1@10.05,17.255 VT2.D@12.4,17.255
  Top Layer w0.5: HL2.1 HL2.1@10.05,17.255 ; VT2.D@12.4,17.255 12.45,17.305 VT2.D
NetHL2_2: HL2.2 R3.1 | length 13.2
  Top Layer w0.2: HL2.2 8.92,15.455 8.625,15.75 8.625,18.025 9.275,18.675 15.875,18.675 16.9,17.65 R3.1@16.9,17.055
NetR2_1: R2.1 VD2.1 VT1.G | length 11
  Top Layer w0.381: v1(37.175,9.1) 37.961,9.885 38.685,9.885 VT1.G@38.85,10.05
  Bottom Layer w0.2: v1@37.217,9.142 VD2.1@44.562,9.142 ; VD2.1 VD2.1@44.725,9.255
  Bottom Layer w0.381: v1(37.175,9.1) v1@37.217,9.142 ; VD2.1@44.562,9.142 VD2.1
  Bottom Layer w0.8: R2.1@44.725,7.925 VD2.1@44.725,9.255
NetR4_1: R4.1 R5.1 VT2.G | length 19.1
  Top Layer w0.2: v1(13.4,13.875) VT2.G ; R4.1@22.4,3.05 v1(23.5,3.05) R5.1@24.6,3.05
  Bottom Layer w0.2: v1@13.4,13.675 13.4,11.651 22.001,3.05 v1(23.5,3.05)
NetVD2_2: VD2.2 VD3.2 | length 3.2
  Bottom Layer w0.381: VD2.2 44.7,14.525 VD3.2
NetVD4_1: VD4.1 X2.1 X2.2
PGOOD: DD1.8 R5.2 | length 9.8
  Top Layer w0.2: R5.2@24.6,4.6 v1(24.6,5.75) ; v1(30.75,2.825) 30.762,2.812 31.987,2.812 DD1.8
  Bottom Layer w0.2: v1(24.6,5.75) 27.825,5.75 v1(30.75,2.825)
SW: C4.2 DD1.1 DD1.2 L1.1
VCC: C3.1 DD1.4 | length 5.8
  Top Layer w0.2: C3.1 26.8,4.6 27.775,5.575 29.624,5.575 29.799,5.4 31.904,5.4 31.952,5.352 DD1.4
pads on no net: DD1.7 DD1.11 DD1.16

## Polygon pours and split planes (outlines as drawn)
GND on Top Layer "Top Layer-GND" (solid, remove dead copper, pour order 98): 0,19.876 0,0 51.5,0 51.8,0.3 51.8,20.1
+VOUT on Top Layer "Top Layer-+VOUT 1" (solid, pour order 70): 20.881,3.9 23.575,3.9 23.575,6.325 23.45,6.45 20.675,6.45
+VOUT on Top Layer "Top Layer-+VOUT 2" (solid, pour order 68): 40.675,2.154 40.675,0.325 43.312,0.325 43.312,2.139
0V_IN on Top Layer "Top Layer-0V_IN" (solid, pour order 38): 40.1,9.148 40.1,15.15 45.65,15.15 48.9,15.15 51.575,15.15 51.575,10.2 48.25,10.2 48.25,7.7 45.75,7.7 45.7,7.75 45.7,9.148
+VOUT on Top Layer "Top Layer-+VOUT" (solid, pour order 24): 16.4,4.05 16.4,12.626 21.075,12.673 21.075,15.95 21.575,15.95 30.25,15.95 30.25,13.275 29.975,13.275 34,13.275 34,9.9 20.95,9.9 20.95,4.05
NetVD4_1 on Top Layer "Top Layer-NetVD4_1" (solid, pour order 22): 1.8,0.3 15.9,0.3 15.9,11.4 15.875,11.425 15.825,11.375 10.6,11.375 10.6,4.8 1.8,4.8
+VIN on Top Layer "Top Layer-+VIN 2" (solid, pour order 26): 37.2,6.35 37.2,4.4 38.95,4.4 38.95,3.875 51.575,3.875 51.575,10 48.575,10 48.55,9.975 48.575,9.95 48.575,7.7 45.75,7.7 45.75,7.55 45.75,7.5 45.75,6.35
SW on Top Layer "Top Layer-SW" (solid, pour order 16): 33.15,6.325 21.15,6.325 21.15,9.85 33.15,9.85
no net on Top Layer "Top Layer-No Net" (solid, pour order 14): 32.8,6.425
no net on Top Layer "Top Layer-No Net 1" (solid, pour order 2): 66.45,-9.625
GND on Bottom Layer "Bottom Layer-GND" (solid, pour order 88): 0,19.776 0,-0.1 51.5,-0.1 51.8,0.2 51.8,20
no net on Bottom Layer "Bottom Layer-No Net 1" (solid, remove dead copper, pour order 76): 0,19.776 0,-0.1 51.5,-0.1 51.8,0.2 51.8,20
no net on Bottom Layer "Bottom Layer-No Net" (solid, pour order 28): 40.725,0.85

## Other copper
Top Layer:
  pour cut-out: 23.95,3.675 23.854,3.771 23.575,3.771 23.575,3.635 23.5,3.56
  pour cut-out: 45.7,8.3 46.16,8.3 46.175,8.315 46.208,8.282 46.208,8.235 45.635,8.235
  pour cut-out: 47.85,10.28 47.85,9.99 47.883,9.957 47.93,9.957 47.93,10.313
  pour cut-out: 48.425,10.855 48.425,10.808 48.472,10.855 48.57,10.855
  pour cut-out: 50.965,10.855 50.965,10.747 50.747,10.529 51.27,10.529
  pour cut-out: 47.85,9.99 47.85,10.28 47.93,10.2 48.25,10.2
  pour cut-out: 48.425,10.855 48.715,10.855 48.948,10.621 48.948,10.513
  pour cut-out: 50.965,10.855 51.57,10.855 51.6,10.825 51.575,10.8 51.575,10.204
  pour cut-out: 43.312,1.367 43.324,1.355 43.646,1.355 43.727,1.437

## Silkscreen, mask and mechanical layers (free items; w line width, h text height)
Top Overlay:
  text "OK" at 8.9,18.3 h2
  text ".designation" at 15.178,18.185 h2
  text "Error" at 38.4,15.3 h2
  text "IN / 10-16V" at 46.6,0.9 h2
  text "OUT 5V" at 11.3,0.8 h2
Bottom Overlay:
  text ".pcb_dec_number" at 31.3,18.2 h2
Board:
  the board outline again, w0.1
Assembly Notes (Mech5):
  text "'.title'" at 1.2,-27 h2
  text "'.project'_'.pcb_dec_number'['.Pcb_File_Name_No_Path']" at 1.2,-29.5 h2